# EAGLE board i - RelayBoard (EAGLE 9.1.1)
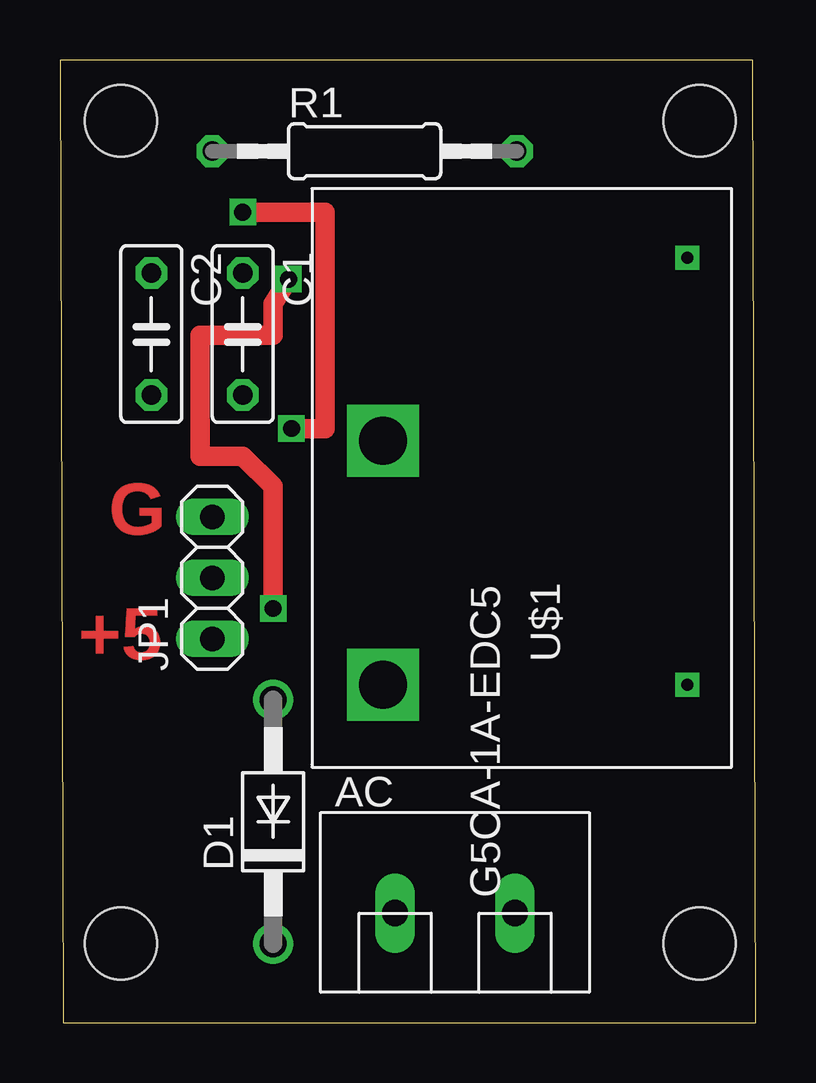
[diagram p0: board, top side]
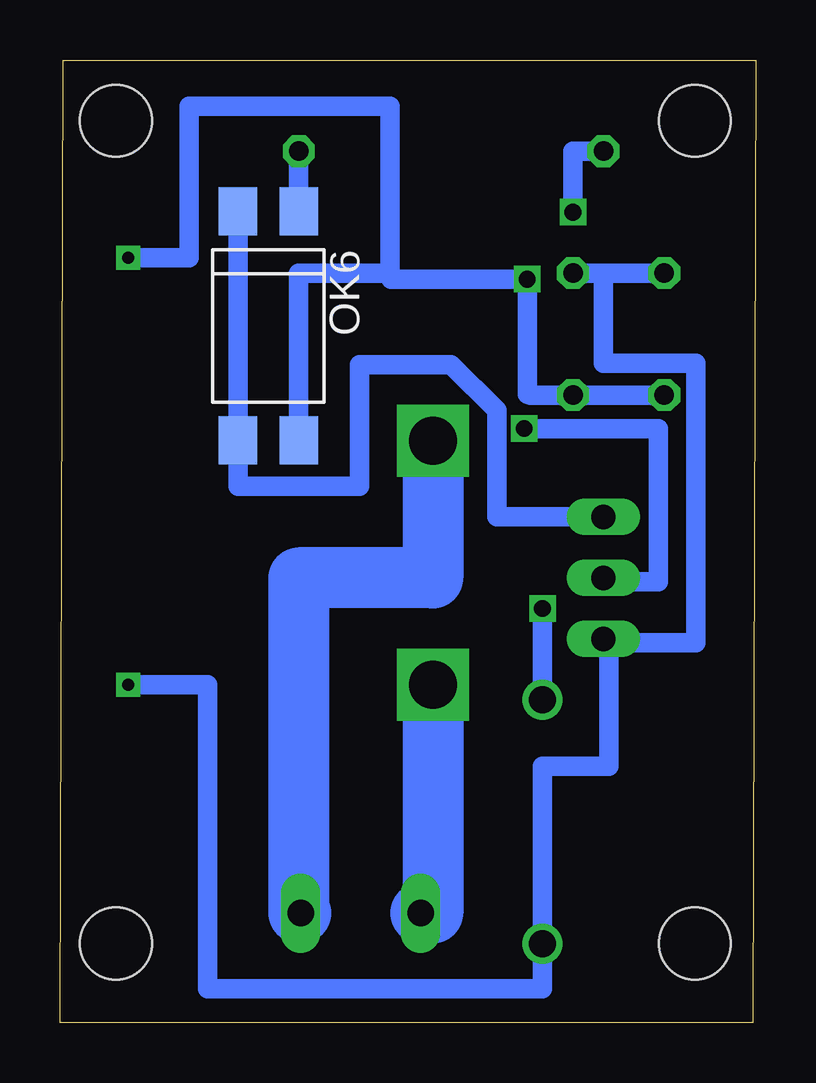
[diagram p1: board, bottom side, seen from below]

Size 29.01 x 40.12 mm. Coordinates in mm from the lower left corner, seen from the top.
Outline: 0.13,0 29.01,0 28.88,40.12 0,40.12 0.13,0
Copper layers (1*16): Top 0.035mm / dielectric 1.5mm / Bottom 0.035mm
Design rules "default": minimum track width 6mil, minimum drill 0.35mm, track to track 6mil, track to pad 6mil, pad to pad 6mil, via to via 6mil, smd to smd 6mil, copper to edge 40mil, drill to drill 6mil, minimum pad ring 10mil, minimum via ring 8mil, stop-mask expansion 4mil, vias tented up to drill 0mil, thermal gap 10mil
Holes 3 mm at 26.67,3.3 26.67,37.59 2.54,37.59 2.54,3.3

## Footprints (pad centres in the part's own frame; a part is rotated, then mirrored left to right if it is on the bottom)
TERM2 = drill 1.1 long: 1 0,0; 2 5,0
C050-025X075 = drill 0.813 octagon: 1 -2.54,0; 2 2.54,0
DO41-10 = drill 1.118: A 5.08,0; C -5.08,0
1X03 = drill 1.016 long: 1 -2.54,0; 2 0,0; 3 2.54,0
DIL4-SMD = smd 1.6 x 2: 1 -1.27,-4.77; 2 1.27,-4.77; 3 1.27,4.77; 4 -1.27,4.77
0207/12 = drill 0.813 octagon: 1 -6.35,0; 2 6.35,0
G5CA-1A-EDC5 = drill 0.5 square: P$1 0.635,-13.462; P$2 18.415,-13.462 | drill 2 square: P$3 0.635,-0.762; P$4 10.795,-0.762

## Placement (x,y rotation side)
AC  TERMINAL2  [TERM2]  13.97,4.57 0 top
C1  0.001u  [C050-025X075]  7.62,28.7 270 top
C2  0.1u  [C050-025X075]  3.81,28.7 270 top
D1  1N4004  [DO41-10]  8.89,8.38 90 top
JP1  [1X03]  6.35,18.54 90 top
OK6  LTV816S  [DIL4-SMD]  20.32,29.04 180 bottom
R1  60  [0207/12]  12.7,36.32 0 top
U$1  G5CA-1A-EDC5  [G5CA-1A-EDC5]  12.7,13.46 90 top

## Library data of the parts
AC = tsh
C1 C2 = rcl; SPICEPREFIX: C
D1 = diode
JP1 = pinhead
OK6 = optocoupler
R1 = rcl; SPICEPREFIX: R
U$1 = mdant

## Nets
+5V: C1.1 C2.1 D1.C JP1.1 U$1.P$1
GND: JP1.3 OK6.2 OK6.3
GPIO0_66: JP1.2 R1.1
N$1: AC.2 U$1.P$4
N$2: AC.1 U$1.P$3
N$5: C1.2 C2.2 D1.A OK6.4 U$1.P$2
N$34: OK6.1 R1.2

## Tracks (layer width: path | path; a pad name or v marks a point on that pad's centre or on a via)
+5V
  Bottom 0.813: C1.1 C2.1 6.35,31.24 6.35,27.48 2.49,27.48 2.49,15.85 6.2,15.85 JP1.1 6.12,15.77 6.12,10.69 8.89,10.69 D1.C 8.89,1.42 22.86,1.42 22.86,14.1 U$1.P$1
GND
  Bottom 0.813: OK6.2 OK6.3 21.59,22.35 16.51,22.35 16.51,27.43 12.7,27.43 10.79,25.53 10.79,21.08 JP1.3
GPIO0_66  (via drill 0.7)
  Top 0.813: v9.65,24.77 11.05,24.77 11.05,33.78 v7.62,33.78
  Bottom 0.813: v9.65,24.77 4.06,24.77 4.06,18.39 6.2,18.39 JP1.2 | v7.62,33.78 7.62,36.32 R1.1
N$1
  Bottom 2.54: U$1.P$4 13.46,18.54 19.05,18.54 19.05,4.57 AC.2
N$2
  Bottom 2.54: U$1.P$3 13.46,4.57 AC.1
N$5  (via drill 0.7)
  Top 0.813: v9.53,30.99 8.89,29.97 8.89,28.65 5.84,28.65 5.84,23.62 7.62,23.62 8.89,22.35 v8.89,17.27
  Bottom 0.813: D1.A v8.89,17.27 | OK6.4 19.05,31.24 15.24,31.24 | 15.24,31.24 15.2,30.99 v9.53,30.99 9.53,26.19 9.4,26.16 C1.2 C2.2 | U$1.P$2 23.62,31.88 23.62,38.19 15.24,38.19 15.24,31.24
N$34
  Bottom 0.813: R1.2 19.05,36.29 OK6.1

## Text on the board
Top: G | +5